# Altium PCB project_buran_a01.PcbDoc
Units mm, origin at the board's own origin, x right, y up, seen from the top; angles counter-clockwise.
Board outline 100 x 50 mm, 2 copper layers (Top Layer, Bottom Layer); 29 components, 35 nets, 148 pads, 196 vias.
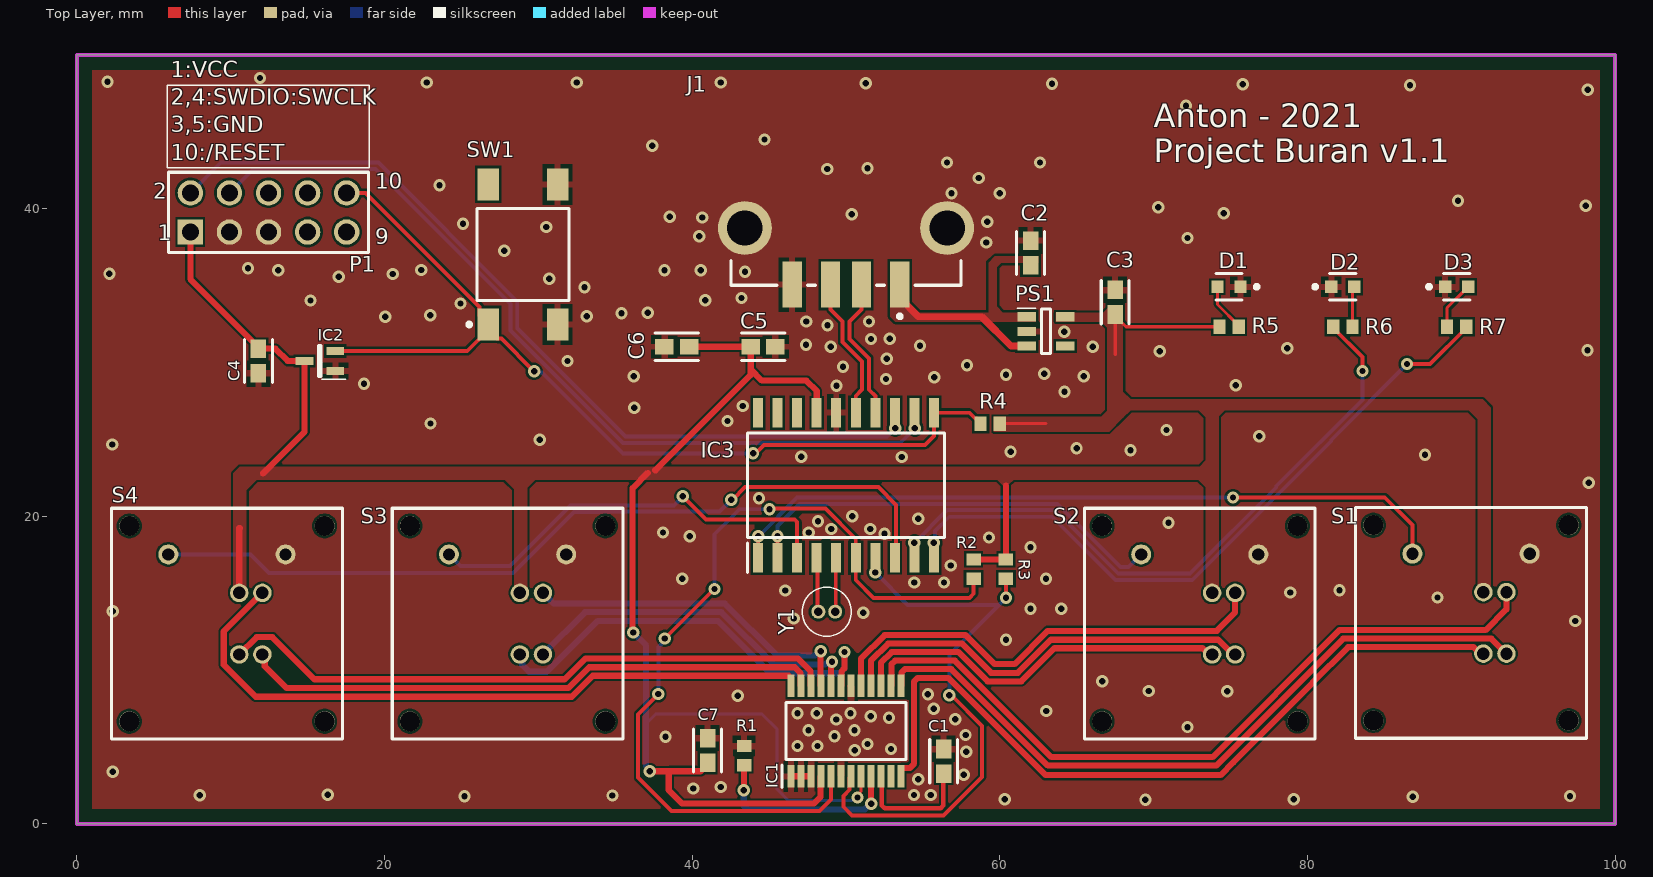
[diagram p0: Top Layer view]
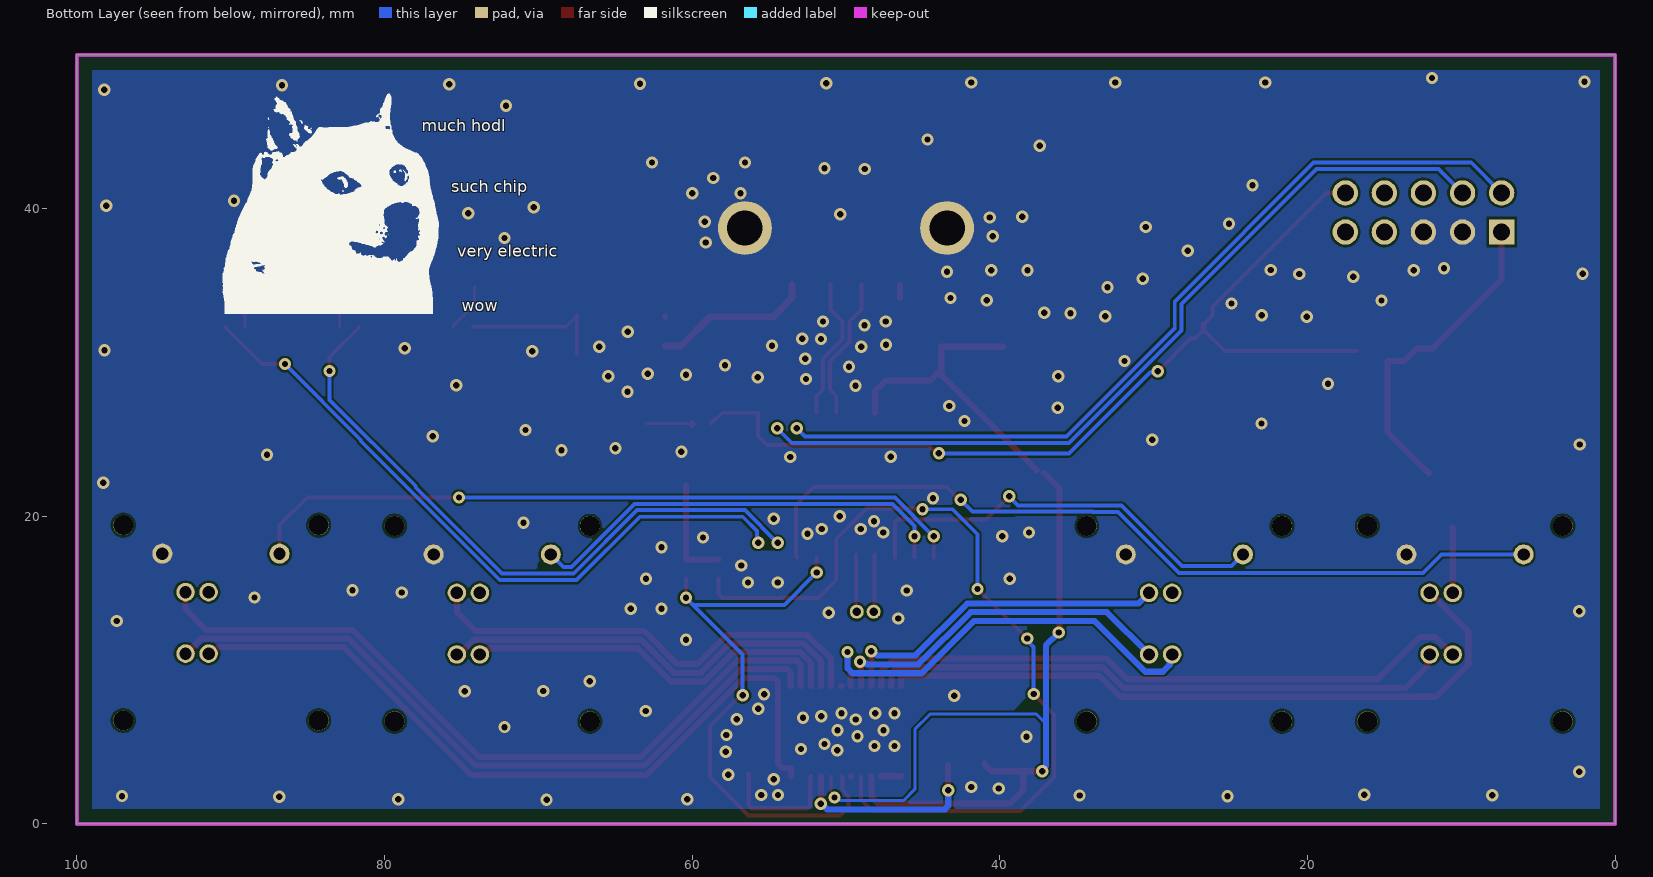
[diagram p1: Bottom Layer view, seen from below]
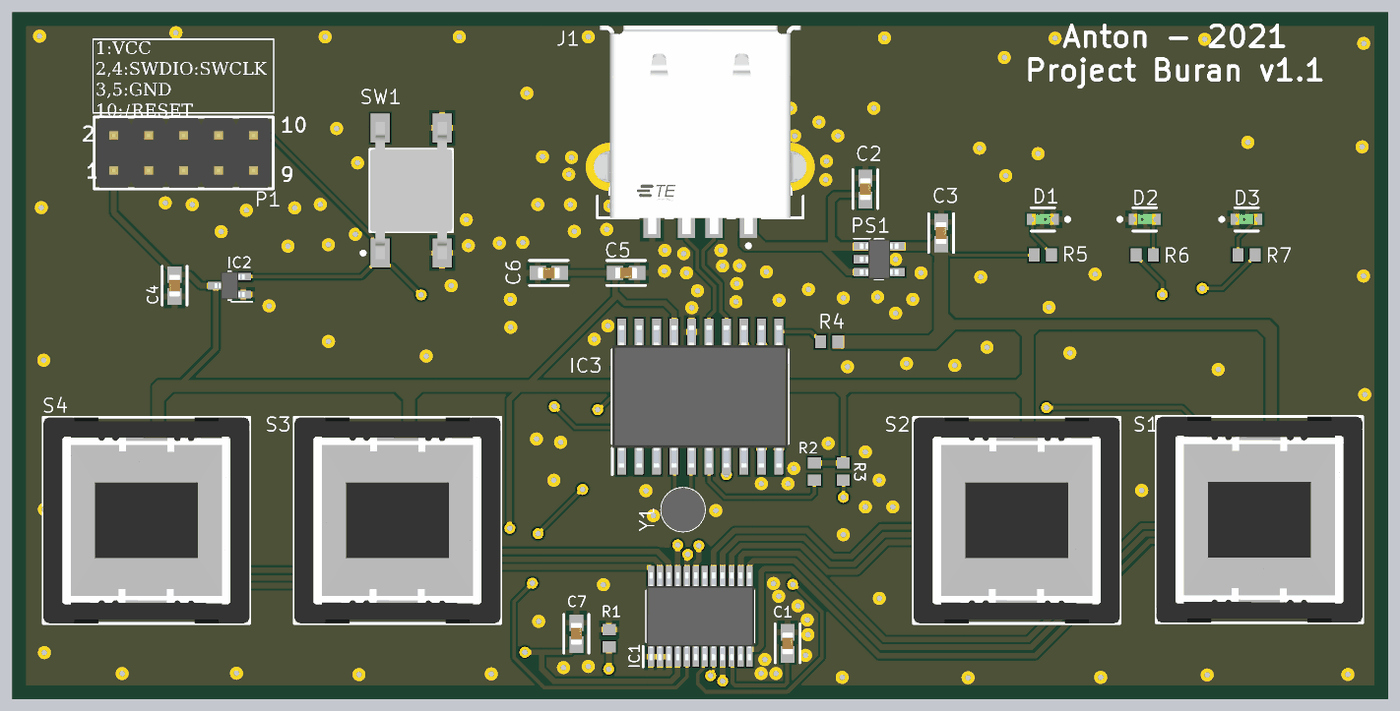
[diagram p2: 3D render of the assembled board from above, using the file's embedded part models]

## Layer stack, top to bottom
Top Solder: solder mask 0.0102, Solder Resist, Dk 3.5
Top Layer: signal copper 0.0356
Dielectric 1: dielectric 0.32, FR-4, Dk 4.8
Bottom Layer: signal copper 0.0356
Bottom Solder: solder mask 0.0102, Solder Resist, Dk 3.5

## Board outline
0,0 100,0 100,50 0,50

## Design rules (kind name [scope] priority, off if disabled: settings)
BoardOutlineClearance [All] p1: gap=0.381 ignorepadtopadclearanceinfootprint=FALSE
Clearance [All] p1: gap=0.152 ignorepadtopadclearanceinfootprint=FALSE except(0: Arc-Hole Track-Hole SMDPad-Hole THPad-Hole Via-Hole Fill-Hole Poly-Hole Region-Hole Text-Hole)
ComponentClearance [All] p1: gap=0.025 collisioncheckmode=3 verticalgap=0.025 showdistances=FALSE
DiffPairsRouting [All] p1: maxlimit=10 minlimit=0.152 mostfreqgap=0.203 toplayer_minwidth=0.152 toplayer_maxwidth=0.381 toplayer_prefwidth=0.203 bottomlayer_minwidth=0.152 bottomlayer_maxwidth=0.381 bottomlayer_prefwidth=0.203 maxuncoupledlength=12.7
HoleSize [All] p1: absolutevalues=TRUE maxlimit=6.731 minlimit=0.33 maxpercent=80.000 minpercent=20.000
HoleToHoleClearance [All] p1: gap=0.254 allowstackedmicrovias=FALSE
MinimumAnnularRing [All] p1: minimumring=0.178
MinimumSolderMaskSliver [All] p1: minsoldermaskwidth=0
PlaneClearance [All] p1: clearance=0.254
PlaneConnect [InNet('GND')] p1: planeconnectstyle=Relief reliefexpansion=0.406 reliefentries=4 reliefconductorwidth=0.152 reliefairgap=0.152
PolygonConnect PolygonConnect_RELIEF [(InComponent('C1') OR InComponent('C2') OR InComponent('C3') OR InComponent('C4') OR InComponent('C5') OR InComponent('C6') OR InComponent('C7') OR InComponent('D1') OR InComponent('D2') OR InComponent('D3') OR InComponent('IC1') OR InComponent('IC2') OR InComponent('IC3') OR InComponent('PS1') OR InComponent('R1') OR InComponent('SW1') OR InComponent('J1')) vs InNet('GND')] p1: thpad.connectstyle=Direct thpad.reliefconductorwidth=0.254 thpad.reliefentries=4 thpad.polygonreliefangle="90 Angle" thpad.airgapwidth=0.254 smdpad.connectstyle=Relief smdpad.reliefconductorwidth=0.42 smdpad.reliefentries=4 smdpad.polygonreliefangle="90 Angle" smdpad.airgapwidth=0.254 via.connectstyle=Direct via.reliefconductorwidth=0.254 via.reliefentries=4 via.polygonreliefangle="90 Angle" via.airgapwidth=0.254
PolygonConnect [All] p2: connectstyle=Direct reliefconductorwidth=0.203 reliefentries=4 polygonreliefangle="90 Angle" airgapwidth=0.152
RoutingCorners [All] p1: cornerstyle=45-Degree minsetback=1.25 maxsetback=1.25
RoutingVias [All] p1: holewidth=0.381 width=0.762 viastyle="Through Hole" minholewidth=0.33 minwidth=0.686 maxholewidth=2.54 maxwidth=2.896
SilkToSilkClearance [All] p1: silktosilkclearance=0
SilkToSolderMaskClearance [IsPad] p1: minsilkscreentomaskgap=0.152 clearancetoexposedcopper=TRUE
SolderMaskExpansion [All] p1: expansion=0.075 istentingtop=FALSE
Width [All] p1: maxlimit=10.16 minlimit=0.152 preferedwidth=0.203
20 further rules are at their usual default settings.

## Classes and differential pairs
differential pair D: +D_P -D_N

## Components (designator, comment, footprint, x,y, rotation, side; value= is the part's Value field where it differs from the comment)
C1 "GRM188R60J106ME47D" FP-GRM188-0_1-e0_2_0_55-IPC_A 56.35,4.075 r90 top
C2 "GRM188R60J106ME47D" FP-GRM188-0_1-e0_2_0_55-IPC_A 62,37.125 r90 top
C3 "GRM188R60J106ME47D" FP-GRM188-0_1-e0_2_0_55-IPC_A 67.5,33.925 r90 top
C4 "GRM188R60J106ME47D" FP-GRM188-0_1-e0_2_0_55-IPC_A 11.8,30.1 r270 top
C5 "GRM188R60J106ME47D" FP-GRM188-0_1-e0_2_0_55-IPC_A 44.61,31.025 r0 top
C6 "GRM188R60J106ME47D" FP-GRM188-0_1-e0_2_0_55-IPC_A 38.998,31.025 r180 top
C7 "GRM188R60J106ME47D" FP-GRM188-0_1-e0_2_0_55-IPC_A 41,4.775 r90 top
D1 "POWER LED" FP-LTST-C190GKT-MFG 74.9,34.925 r180 top
D2 "POWER LED" FP-LTST-C190GKT-MFG 82.3,34.925 r0 top
D3 "POWER LED" FP-LTST-C190GKT-MFG 89.7,34.925 r0 top
IC1 "LP5012PWR" SOP65P640X120-24N 50,6.041 r90 top
IC2 "MAX803SQ308T1G" SOT65P220X100-3N 15.8,30.1 r180 top
IC3 "ATSAMD11D14A-SSUT" SOIC127P1032X265-20N 50,22.025 r90 top
J1 "292303-7" FP-292303-7-MFG 50,42.025 r270 top
P1 "61301021121" 61301021121 12.46,39.755 r0 top
PS1 "TLV75733PDBVR" SOT95P280X145-5N 63,32.025 r0 top
R1 "CRCW0603110RFKEA" RESC1609X50X30NL10T20 43.375,4.45 r270 top
R2 "CRCW0603110RFKEA" RESC1609X50X30NL10T20 58.297,16.575 r90 top
R3 "CRCW0603110RFKEA" RESC1609X50X30NL10T20 60.397,16.575 r90 top
R4 "CRCW0603110RFKEA" RESC1609X50X30NL10T20 59.375,26.025 r0 top
R5 "CRCW0603110RFKEA" RESC1609X50X30NL10T20 74.9,32.325 r180 top
R6 "CRCW0603110RFKEA" RESC1609X50X30NL10T20 82.3,32.325 r180 top
R7 "CRCW0603110RFKEA" RESC1609X50X30NL10T20 89.7,32.325 r0 top
S1 "465M111172501" 465M111172501 90.634,13.076 r0 top
S2 "465M111172501" 465M111172501 73,13.025 r0 top
S3 "465M111172501" 465M111172501 28,13.025 r0 top
S4 "465M111172501" 465M111172501 9.756,13.025 r0 top
SW1 "FSM4JSMA" TECO-FSM4JSMA_V 29,37.025 r180 top
Y1 "AB38T-32.768KHZ" AB38T32768KHZ 48.2,13.8 r90 top

## Footprints (in the part's own frame and the unit in brackets; to place one, negate y for a bottom-side part, rotate by r counter-clockwise, add the part's x,y. Pads: shape width x height; smd on the part's side, far side on the other; paste and mask are expansions set on the pad)
465M111172501 [mm] "15x15mm THT Push Button Switch with integrated LED RGB"
  round 1.3 hole 0.8: 1(-3.81,4.5) 2(3.81,4.5)
  round 1.2 hole 0.8: L1(0.8,-2) L2(2.3,-2) L3(2.3,2) LC(0.8,2)
  round 1.3 hole 1.3 unplated: MH1(-6.35,-6.35) MH2(-6.35,6.35) MH3(6.35,6.35) MH4(6.35,-6.35)
  silkscreen extent -7.5,-7.5 7.5,7.5, body extent -7.5,-7.5 7.5,7.5, height 19.55
61301021121 [mm] "Pin Header, pitch 2.54 mm, THT, Vertical, dual row, 10p"
  rect 1.65x1.65 hole 1.1: 1(-5.08,-1.27)
  round 1.65 hole 1.1: 2(-5.08,1.27) 3(-2.54,-1.27) 4(-2.54,1.27) 5(0,-1.27) 6(0,1.27) 7(2.54,-1.27) 8(2.54,1.27) 9(5.08,-1.27) 10(5.08,1.27)
  silkscreen extent -6.5,-2.62 6.5,2.62, body extent -6.35,-2.54 6.35,2.54, height 8.59
AB38T32768KHZ [mm]
  round 0.91 hole 0.55: 1(0,0) 2(0,-1.1)
  silkscreen extent -1.6,-2.15 1.6,1.05, body extent -1.6,-2.15 1.6,1.05, height 8.4
FP-292303-7-MFG [mm]
  rect 3x1.25 smd paste+0 mask+0: 1(6.96,3.5) 2(6.96,1) 3(6.96,-1) 4(6.96,-3.5)
  round 3.5 hole 2.3 paste-1000 mask+0: 5(3.28,6.57) 6(3.28,-6.57)
  silkscreen extent 5.4,-7.47 9.15,7.47, body extent -7.1,-8.42 8.56,8.42, height 0.25
FP-GRM188-0_1-e0_2_0_55-IPC_A [mm]
  rect 1.208x1.012 smd paste+0 mask+0: 1(-0.802,0) 2(0.802,0)
  silkscreen extent -1.41,-0.91 1.41,0.91, body extent -1.91,-1.01 1.91,1.01, height 0.25
FP-LTST-C190GKT-MFG [mm]
  rect 0.8x0.8 smd paste+0 mask+0: 1(-0.75,0) 2(0.75,0)
  silkscreen extent -1.92,-0.85 0.85,0.85, body extent -1.25,-0.55 1.25,0.55, height 0.25
RESC1609X50X30NL10T20 [mm] "Chip Resistor, 2-Leads, Body 1.55x0.85mm, IPC Medium Density"
  rect 0.8x0.95 smd: 1(-0.625,0) 2(0.625,0)
  body extent -0.82,-0.48 0.82,0.48, height 0.5
SOIC127P1032X265-20N [mm]
  rect 1.925x0.65 smd: 1(-4.712,5.715) 2(-4.712,4.445) 3(-4.712,3.175) 4(-4.712,1.905) 5(-4.712,0.635) 6(-4.712,-0.635) 7(-4.712,-1.905) 8(-4.712,-3.175) 9(-4.712,-4.445) 10(-4.712,-5.715) 11(4.712,-5.715) 12(4.712,-4.445) 13(4.712,-3.175) 14(4.712,-1.905) 15(4.712,-0.635) 16(4.712,0.635) 17(4.712,1.905) 18(4.712,3.175) 19(4.712,4.445) 20(4.712,5.715)
  silkscreen extent -5.68,-6.4 3.4,6.4, body extent -5.16,-6.4 5.16,6.4, height 2.65
SOP65P640X120-24N [mm]
  rect 1.475x0.45 smd: 1(-2.938,3.575) 2(-2.938,2.925) 3(-2.938,2.275) 4(-2.938,1.625) 5(-2.938,0.975) 6(-2.938,0.325) 7(-2.938,-0.325) 8(-2.938,-0.975) 9(-2.938,-1.625) 10(-2.938,-2.275) 11(-2.938,-2.925) 12(-2.938,-3.575) 13(2.938,-3.575) 14(2.938,-2.925) 15(2.938,-2.275) 16(2.938,-1.625) 17(2.938,-0.975) 18(2.938,-0.325) 19(2.938,0.325) 20(2.938,0.975) 21(2.938,1.625) 22(2.938,2.275) 23(2.938,2.925) 24(2.938,3.575)
  silkscreen extent -3.67,-3.9 1.85,4.15, body extent -3.2,-3.9 3.2,3.9, height 1.2
SOT65P220X100-3N [mm]
  rect 1.15x0.55 smd: 1(-1,0.65) 2(-1,-0.65) 3(1,0)
  silkscreen extent -1.67,-1 0.08,1.17, body extent -1.1,-1 1.1,1, height 1
SOT95P280X145-5N [mm]
  rect 1.2x0.6 smd: 1(-1.25,0.95) 2(-1.25,0) 3(-1.25,-0.95) 4(1.25,-0.95) 5(1.25,0.95)
  silkscreen extent -1.85,-1.45 0.3,1.5, body extent -1.4,-1.45 1.4,1.45, height 1.45
TECO-FSM4JSMA_V [mm] "SMD, 4-Leads, Body 6x6mm, Pitch 4.5mm"
  rect 1.4x2.1 smd: 1(2.25,4.55) 2(2.25,-4.55) 3(-2.25,4.55) 4(-2.25,-4.55)
  silkscreen extent -3,-3 3.62,4.67, body extent -3,-5 3,5, height 5.08

## Part data
C1 C2 C3 C4 C5 C6 C7: library part CMP-2006-02792-2, "Chip Multilayer Ceramic Capacitors for General Purpose, 0603, 10uF, X5R, 15%, 20%, 6.3V", Capacitance=10uF, Case Code (Imperial)=0603, Case Code (Metric)=1608, Dielectric=X5R, Max Operating Temperature=85°C, Min Operating Temperature=-55°C, Package Quantity=4000, Tolerance=20%, Voltage=6.3V, Case/Package=0603, Depth=0.8mm, Height=0.8mm, Lead Free="Lead Free", Length=1.6mm, Material=Ceramic, Mount="Surface Mount", Packaging="Tape and Reel", Radiation Hardening=No, REACH SVHC="No SVHC", Termination=SMD/SMT, Thickness=0.035inch, Voltage Rating=6.3V, Voltage Rating (DC)=6.3V, Width=0.031inch
D1 D2 D3: library part CMP-22017-000005-2, "LED GREEN CLEAR CHIP SMD", Case Code (Imperial)=0603, Case Code (Metric)=1608, Color=Green, Forward Current=30mA, Forward Voltage=2.1V, Lens Color=Colorless, Max Operating Temperature=85°C, Min Operating Temperature=-55°C, Package Quantity=1, Power Dissipation=100mW, Reverse Voltage=5V, Test Current=10mA, Voltage=2V, Case/Package=0603, Depth=0.8mm, Dominant Wavelength=569nm, Height=0.8mm, Illumination Color=Green, Lead Free="Lead Free", Length=1.6mm, Lens Style=Clear, Lens Transparency=Clear, Luminous Intensity=6mcd, Mount="Surface Mount", Number of Elements=1, Number of LEDs=1, Number of Pins=2, Packaging="Tape and Reel", Power Rating=100mW, Radiation Hardening=No, Viewing Angle=130°, Wavelength=565nm, Width=0.8mm
IC1: "Integrated Circuit", Manufacturer_Name="Texas Instruments", Mouser Part Number=595-LP5012PWR, Datasheet Link=https://www.ti.com/lit/ds/symlink/lp5012.pdf?ts=1615929314042&ref_url=https%253A%252F%252Fwww.mouser.co.uk%252F, Height=1.2mm, Manufacturer_Part_Number=LP5012PWR, Mouser Price/Stock=https://www.mouser.co.uk/ProductDetail/Texas-Instruments/LP5012PWR/?qs=T94vaHKWudSL6jLwBy12Hg%3D%3D
IC2: "Integrated Circuit", Manufacturer_Name="ON Semiconductor", Mouser Part Number=863-MAX803SQ308T1G, Arrow Part Number=MAX803SQ308T1G, Arrow Price/Stock=https://www.arrow.com/en/products/max803sq308t1g/on-semiconductor, Datasheet Link=http://www.onsemi.com/pub/Collateral/MAX803-D.PDF, Height=1mm, Manufacturer_Part_Number=MAX803SQ308T1G, Mouser Price/Stock=https://www.mouser.co.uk/ProductDetail/ON-Semiconductor/MAX803SQ308T1G?qs=aSUclzrs14xj4ys5ck7Tew%3D%3D
IC3: "Integrated Circuit", Manufacturer_Name=Microchip, Mouser Part Number=556-ATSAMD11D14ASSUT, Arrow Part Number=ATSAMD11D14A-SSUT, Arrow Price/Stock=https://www.arrow.com/en/products/atsamd11d14a-ssut/microchip-technology, Datasheet Link=http://ww1.microchip.com/downloads/en/devicedoc/atmel-42363-sam-d11_datasheet.pdf, Height=2.65mm, Manufacturer_Part_Number=ATSAMD11D14A-SSUT, Mouser Price/Stock=https://www.mouser.co.uk/ProductDetail/Microchip-Technology-Atmel/ATSAMD11D14A-SSUT/?qs=lrqjml%252Bjt8f8EFewxXrzCw%3D%3D
J1: library part CMP-03360-000008-1, "CONN RCPT USB2.0 TYPEA 4P SMD RA", Current Rating=1A, Manufacturer="TE Connectivity", Temperature="-55°C to +85°C", Temperature Range High=+85°C, Temperature Range Low=-55°C, Voltage Rating=30V, Automotive=No, Category=Conn, ComponentLink2Description=Datasheet, ComponentLink2URL=https://www.te.com/usa-en/product-292303-7.html?te_bu=Cor&te_type=other&te_campaign=oct_glo_cor-oct-global-oth-prtnr-fy19-oct-octo-buy-bom_sma-298_2&elqCampaignId=35216, Conn Orientation="Right Angle", Contact Material=Gold,Nickel, Device Class L1=Connectors, Device Class L2="USB Connectors", Device Class L3=unset, Digikey Description="CONN RCPT USB2.0 TYPEA 4P SMD RA", Is Female=yes, Lead Free=Yes, Manufacturer Part Number=292303-7, Mouser Description="USB Connectors USB A R/A Recpt Assy SMT", Number Of Contacts=4, Octopart=https://octopart.com/292303-7-te+connectivity-42840369, Package=292303-7, RoHS=TRUE, Shielding=true, Usb Standard="USB 2.0"
P1: library part CMP-1502-01084-1, "THT Vertical Pin Header WR-PHD, Pitch 2.54 mm, Dual Row, 10 pins", Contact Resistance=20mOhm, Manufacturer="Wurth Elektronik", Operating Temperature=-40to105degC, Rated Current=3A, Withstanding Voltage=500VAC, Working Voltage=250VAC, Datasheet URL=https://katalog.we-online.de/em/datasheet/6130xx21121.pdf, Gender=Male, Manufacturer URL=http://www.we-online.de, Mounting Technology=THT, Orientation=Vertical, Package Reference=61301021121, Packaging=Bag, Part Number=61301021121, Pin Number=10, Pitch=2.54mm, Publisher=WurthElektronik, Row Number=Dual
PS1: "Power Supply", Manufacturer_Name="Texas Instruments", Mouser Part Number=595-TLV75733PDBVR, Arrow Part Number=TLV75733PDBVR, Arrow Price/Stock=https://www.arrow.com/en/products/tlv75733pdbvr/texas-instruments, Datasheet Link=http://www.ti.com/lit/gpn/tlv757p, Height=1.45mm, Manufacturer_Part_Number=TLV75733PDBVR, Mouser Price/Stock=https://www.mouser.co.uk/ProductDetail/Texas-Instruments/TLV75733PDBVR/?qs=y6ZabgHbY%252BwAAzSntTW34w%3D%3D
R1 R2 R3 R4 R5 R6 R7: library part CMP-2000-03854-1, Manufacturer="Vishay Dale", Part Number=CRCW0603110RFKEA
S1 S2 S3 S4: "WS-PBTL Illuminated THT Push Button Switch, Red & Green & Blue", Emitting Color="Red & Green & Blue", Operating Temperature="-40 to +85degC", Rated Current=100mA, Rated Voltage=12VDC, ComponentLink1Description=Manufacturer, ComponentLink1URL=http://www.we-online.de, ComponentLink2Description=Datasheet, ComponentLink2URL=https://katalog.we-online.com/em/datasheet/465M111172501.pdf, Contact Material="Copper Alloy", Contact Plating=Gold, Mounting Technology=THT, Operation Force=200gf, Packaging="ESD Tray", Part Number=465M111172501, Published Date="September 2019", Publisher="Wurth Elektronik", Size=15x15mm, Terminal Material="Copper Alloy", Terminal Plating=Tin
SW1: library part CMP-2000-05602-2, "Swicth, SPST, 24 V, -35 to 85 degC, 4-Pin SMD, RoHS, Tape and Reel", Case\/Package=SMD/SMT, Contact Current Rating=50mA, Contact Resistance=100mOhm, Manufacturer="TE Connectivity", Max Operating Temperature=85degC, Max Voltage Rating (DC)=12V, Min Operating Temperature=-35degC, Operating Force=1.57N, Package Description="4-Pin Surface Mount Device, Body 6 x 6 mm, Pitch 4.5 mm", Package Quantity=750, Voltage Rating=24V, Actuator Length=0.055inch, Actuator Material=Polyamide, Contact Material=CopperAlloy, Contact Plating=Silver, Current Rating=50mA, Datasheet URL=http://www.te.com/commerce/DocumentDelivery/DDEController?Action=showdoc&DocId=Customer+Drawing%7F2-1437565-7%7FV%7Fpdf%7FEnglish%7FENG_CD_2-1437565-7_V.pdf%7F4-1437565-2, Datasheet Version="Rev. V, 02/2015", Electrical Life=100000Cycles, Illumination Type=Illuminated, Length=6mm, Manufacturer URL=http://www.te.com/, Mechanical Life=100000Cycles, Mount=SurfaceMount, Mounting Technology=SurfaceMount, Orientation=Straight, Package Reference=FSM4JSMA, Packaging=LoosePiece, REACH SVHC=Unknown, RoHSCompliant=true, Switch Travel=0.25mm, Termination=GullWing, Throw Configuration=SPST, Voltage Rating (DC)=24V, Width=6mm
Y1: "Crystal or Oscillator", Manufacturer_Name=ABRACON, Mouser Part Number=815-AB38T-32.768KHZ, Arrow Part Number=AB38T-32.768KHZ, Arrow Price/Stock=https://www.arrow.com/en/products/ab38t-32.768khz/abracon, Datasheet Link=http://www.abracon.com/Resonators/AB38T.pdf, Height=8.3mm, Manufacturer_Part_Number=AB38T-32.768KHZ, Mouser Price/Stock=https://www.mouser.co.uk/ProductDetail/ABRACON/AB38T-32768KHZ/?qs=m%252BUhWDcpCfbdp9ovMbeW3g%3D%3D

## Via types
v1: diameter 0.8, hole 0.411, Top Layer to Bottom Layer, 196 vias

## Nets (pads, with @x,y where several pads share a name; then routed paths per layer and width w, separated by ;. In a path a pad name is that pad's centre, name@x,y a point inside that pad or via, vN(x,y) a via of type N, cw(c..) or ccw(c..) an arc to the next point about the centre after c; other vN are vias at no path point)
/RESET: IC2.2 IC3.11 P1.10 R4.1 SW1.1 | length 61.4
  Top Layer w0.254: IC2.2 25.375,30.75 SW1.1@26.75,32.125 ; P1.10 18.775,41.025 26.177,33.623 26.177,33.048 SW1.1 ; SW1.1@26.888,31.988 27.323,31.552 27.598,31.552 v1(29.725,29.425) ; v1(43.96,24.096) 44.108,24.096 44.657,24.645 55.145,24.645 55.715,25.215 IC3.11 58.038,26.737 58.402,26.373 58.477,26.373 58.75,26.1 R4.1
  Top Layer w0.4: SW1.1@26.75,32.125 SW1.1
  Bottom Layer w0.254: v1(29.725,29.425) 29.798,29.352 30.248,29.352 35.504,24.096 v1(43.96,24.096)
D_N: IC3.14 J1.2 | length 9.3
  Top Layer w0.254: J1.2 51,33.438 50.229,32.667 50.229,31.531 51.5,30.26 51.5,28.231 51.905,27.827 IC3.14
D_P: IC3.15 J1.3 | length 9.3
  Top Layer w0.254: J1.3 49,33.438 49.771,32.667 49.771,31.342 51.043,30.07 51.043,28.234 50.635,27.827 IC3.15
GND: C1.2 C2.2 C3.2 C4.2 C5.2 C6.2 C7.2 D1.1 D2.1 D3.1 IC1.1 IC1.2 IC1.3 IC1.6 IC1.18 IC2.1 IC3.16 J1.4 J1.5 J1.6 P1.3 P1.5 PS1.2 R1.1 S1.2 S2.2 S3.2 S4.2 SW1.3 SW1.4 | length 4.3
  Top Layer w0.203: v1(40.45,38.2) v1@40.564,38.314 ; J1.6@42.999,38.314 J1.6 ; J1.5 J1.5@57.015,38.3 ; D2.1@81.488,34.987 D2.1
  Top Layer w0.4: IC1.1@46.4,3.128 IC1.1 IC1.2 ; J1.4@46.5,34.19 J1.4 ; IC1.2@47.062,3.115 IC1.2 ; IC1.3 IC1.2 ; IC1.18@50.313,8.967 IC1.18 ; J1.5 J1.5@56.975,39.15
  other v1: 69.464,1.575 60.314,1.6 79.1,1.6 86.839,1.775 25.2,1.8 97.065,1.814 34.814,1.85 7.989,1.875 54.425,1.886 55.5,1.881 16.3,1.9 40.062,2.311 41.863,2.401 54.7,2.9 57.65,3.206 2.339,3.4 57.825,4.706 50.562,4.799 52.925,4.877 46.85,5.075 48.15,5.075 51.4,5.2 38.262,5.676 49.25,5.7 57.775,5.781 47.562,6.099 50.55,6.1 72.2,6.3 49.362,6.799 57.1,6.8 52.8,6.9 51.6,7 46.85,7.2 48.1,7.2 50.289,7.199 63.014,7.35 55.7,7.5 42.962,8.34 55.325,8.431 69.691,8.641 74.789,8.625 66.65,9.275 60.397,11.977 97.4,13.2 46.595,13.365 51.13,13.739 2.339,13.825 62,14 64,14 88.451,14.721 78.88,15.05 46.05,15.181 82.08,15.2 54.442,15.694 56.372,15.694 39.364,15.943 63,15.95 56.8,16.8 62,18 59.3,18.625 39.85,18.706 52.5,18.875 38.1,18.946 47.575,18.95 49.04,19.175 51.58,19.175 70.97,19.587 48.178,19.684 54.698,19.845 50.4,20 44.347,21.174 98.289,22.175 53.629,23.859 47.088,23.865 87.639,24 60.7,24.2 68.5,24.3 64.991,24.434 2.289,24.675 30.089,24.975 76.864,25.2 70.84,25.617 22.985,26.04 42.3,26.2 36.233,27.069 43.289,27.175 64.2,28.1 49.387,28.49 75.339,28.525 18.664,28.625 52.6,28.925 55.728,29.043 36.2,29.1 65.447,29.1 60.4,29.2 62.889,29.275 49.8,29.725 57.864,29.825 31.9,30.1 52.65,30.25 70.389,30.725 98.2,30.8 78.693,30.935 49,31.025 66.039,31.025 54.809,31.1 47.401,31.157 51.625,31.531 52.839,31.55 64.195,32.006 48.8,32.425 47.425,32.667 51.5,32.667 20.038,32.978 33.148,33.015 22.975,33.075 35.4,33.2 37.105,33.242 24.937,33.836 15.185,34.028 40.85,34.05 43.204,34.19 33,34.9 30.7,35.45 17.02,35.582 2.114,35.775 20.527,35.76 43.43,35.9 13.083,35.996 38.196,36 40.564,36 22.391,36.011 11.125,36.125 27.775,37.275 59.125,37.8 72.2,38.1 30.516,38.808 25.1,39.03 59.175,39.15 40.65,39.425 38.539,39.476 50.375,39.631 74.55,39.7 70.3,40.1 98.1,40.2 89.789,40.525 56.861,41 60,41 23.575,41.531 58.625,42 48.775,42.581 51.398,42.624 56.57,43 62.616,43.009 37.4,44.1 44.7,44.5 72.1,46.7 98.214,47.725 86.664,48.025 75.789,48.1 63.389,48.125 51.289,48.15 22.739,48.2 32.489,48.2 41.864,48.2 1.989,48.25 11.9,48.5
LED_OUT_1: IC3.9 R6.2 | length 42
  Top Layer w0.254: R6.2 81.675,32.25 83.575,30.35 v1(83.575,29.45)
  Bottom Layer w0.254: v1(54.442,18.278) 56.564,20.4 63.575,20.4 67.7,16.275 72.361,16.275 77.968,21.882 77.968,21.969 83.575,27.576 v1(83.575,29.45)
LED_OUT_2: IC3.10 R7.2 | length 44.3
  Top Layer w0.254: v1(86.475,29.9) 87.975,29.9 90.325,32.25 R7.2
  Bottom Layer w0.254: v1(55.712,18.278) 55.798,18.364 55.798,19.059 56.714,19.975 63.399,19.975 67.524,15.85 72.511,15.85 81.548,24.887 81.548,24.973 v1(86.475,29.9)
NetC1_1: C1.1 IC1.10 | length 8.1
  Top Layer w0.3: IC1.10 52.335,3.043 52.335,1.201 52.511,1.025 56.148,1.025 56.323,1.201 56.323,3.247 C1.1
NetD1_2: D1.2 R5.1 | length 3.2
  Top Layer w0.203: D1.2 74.15,33.775 75.525,32.4 R5.1
NetD2_2: D2.2 R6.1 | length 2.7
  Top Layer w0.203: R6.1 82.925,34.8 D2.2
NetD3_2: D3.2 R7.1 | length 3.2
  Top Layer w0.203: R7.1 89.075,33.55 D3.2
NetIC1_9: IC1.9 R1.2 | length 13
  Top Layer w0.4: v1(43.35,2.2) 43.363,2.213 43.363,3.813 R1.2 ; IC1.9 51.629,3.099 51.629,1.329 v1(51.632,1.325)
  Bottom Layer w0.4: v1(43.35,2.2) 43.35,1.184 43.584,0.95 51.216,0.95 51.591,1.325 v1(51.632,1.325)
OUT0: IC1.12 S1.L1 | length 50.2
  Top Layer w0.4: IC1.12 53.575,3.615 53.6,3.64 54.14,3.64 54.425,3.925 54.425,9.266 54.659,9.5 56.65,9.5 62.975,3.175 74.35,3.175 75.175,4 80.325,9.15 80.325,9.175 82.65,11.5 90.8,11.5 91.224,11.076 S1.L1
OUT1: IC1.13 S1.L2 | length 46.7
  Top Layer w0.4: IC1.13 53.6,9.004 53.6,9.841 53.834,10.075 56.856,10.075 63.129,3.802 74.077,3.802 82.327,12.052 91.958,12.052 S1.L2
OUT2: IC1.14 S1.L3 | length 49.2
  Top Layer w0.4: IC1.14 52.95,9.004 52.95,10.381 53.197,10.627 57.085,10.627 63.358,4.355 73.83,4.355 82.08,12.605 91.58,12.605 92.934,13.959 S1.L3
OUT3: IC1.15 S2.L1 | length 25.2
  Top Layer w0.4: IC1.15 52.275,10.487 52.968,11.18 57.314,11.18 59.219,9.275 61.4,9.275 63.55,11.425 73.184,11.425 73.584,11.025 S2.L1
OUT4: IC1.16 S2.L2 | length 27.8
  Top Layer w0.4: IC1.16 51.625,10.618 52.739,11.732 57.543,11.732 59.447,9.827 61.171,9.827 63.321,11.977 74.194,11.977 75.147,11.025 S2.L2
OUT5: IC1.17 S2.L3 | length 30.2
  Top Layer w0.4: IC1.17 50.975,10.749 52.51,12.285 57.771,12.285 59.656,10.4 60.963,10.4 63.113,12.55 74.098,12.55 75.3,13.752 S2.L3
OUT6: IC1.19 S3.L1 | length 28.1
  Top Layer w0.4: IC1.19 49.7,9.004 49.7,9.913 49.9,10.113 v1(49.9,11.18)
  Bottom Layer w0.4: S3.L1 28.953,10.872 28.953,10.347 29.4,9.9 30.55,9.9 33.85,13.2 41.675,13.2 45.075,9.8 49.587,9.8 49.9,10.113 v1(49.9,11.18)
OUT7: IC1.20 S3.L2 | length 23
  Top Layer w0.4: IC1.20 49.025,10.484 v1(49.094,10.552)
  Bottom Layer w0.4: S3.L2 33.048,13.773 41.896,13.773 45.295,10.374 48.66,10.374 48.761,10.476 49.017,10.476 v1(49.094,10.552)
OUT8: IC1.21 S3.L3 | length 22.1
  Top Layer w0.4: v1(48.366,11.238) 48.341,11.213 48.341,9.827 48.35,9.818 48.35,9.004 IC1.21
  Bottom Layer w0.4: S3.L3 31,14.325 42.125,14.325 45.485,10.965 47.985,10.965 48.258,11.238 v1(48.366,11.238)
OUT9: IC1.22 S4.L1 | length 40.6
  Top Layer w0.4: S4.L1 11.681,12.15 12.7,12.15 15.441,9.409 31.705,9.409 33.066,10.769 46.877,10.769 47.7,9.946 47.7,9.004 IC1.22
OUT10: IC1.23 S4.L2 | length 37.8
  Top Layer w0.4: S4.L2 12.209,10.872 12.209,10.259 13.634,8.834 15.925,8.834 19.428,8.834 31.944,8.834 33.304,10.194 46.67,10.194 47.05,9.815 47.05,9.004 IC1.23
OUT11: IC1.24 S4.L3 | length 44.6
  Top Layer w0.4: S4.L3 9.55,12.519 9.55,10.35 11.625,8.275 19.197,8.275 32.175,8.275 33.535,9.635 46.281,9.635 46.425,9.491 IC1.24
SCL: IC1.7 IC3.7 R3.1 | length 38
  Top Layer w0.254: IC1.7 50.227,3.005 50.227,2.227 49.825,1.825 49.825,1.124 50.399,0.55 56.35,0.55 58.85,3.05 58.85,6.375 56.857,8.368 v1(56.718,8.368) ; v1(51.905,16.351) IC3.7 IC3.7@51.907,17.311 ; v1(60.397,14.7) R3.1
  Bottom Layer w0.254: v1(51.905,16.351) 54.006,14.25 59.947,14.25 ; v1@56.65,8.436 v1(56.718,8.368) 56.718,11.021 59.947,14.25 ; v1@60.249,14.7 v1(60.397,14.7) 59.947,14.25
SDA: IC1.5 IC3.6 R2.1 | length 55.8
  Top Layer w0.254: v1(37.8,8.45) 36.475,7.125 36.475,3.011 38.643,0.843 48.268,0.843 49.025,1.6 IC1.5 ; v1(38.217,12.061) v1@41.45,15.294 ; v1(45.029,20.462) 45.065,20.498 48.678,20.498 50.635,18.541 IC3.6 50.635,15.865 51.8,14.7 58.028,14.7 58.297,14.969 R2.1
  Bottom Layer w0.254: v1(37.8,8.45) 37.8,11.497 38.217,11.914 v1(38.217,12.061) ; v1(41.45,15.275) 41.45,18.835 43.077,20.462 v1(45.029,20.462)
SW0: IC3.1 S1.1 | length 47.6
  Top Layer w0.254: IC3.1 44.293,17.321 44.293,18.693 v1(44.3,18.7) ; v1(75.158,21.225) 85.025,21.225 86.824,19.426 S1.1
  Bottom Layer w0.254: v1(44.3,18.7) 46.825,21.225 v1(75.158,21.225)
SW1: IC3.2 S2.1 | length 28.3
  Top Layer w0.254: v1(45.55,18.7) 45.553,18.697 45.553,17.316 IC3.2
  Bottom Layer w0.254: v1(45.55,18.7) 45.55,19.375 46.981,20.806 63.744,20.806 67.85,16.7 68.365,16.7 S2.1
SW2: IC3.3 S3.1 | length 28
  Top Layer w0.254: S3.1@24.19,17.385 S3.1 ; v1(39.395,21.3) 40.912,19.783 46.668,19.783 46.825,19.626 IC3.3
  Bottom Layer w0.254: S3.1 24.94,16.775 28.164,16.775 32.089,20.7 33.786,20.7 33.797,20.711 38.805,20.711 v1(39.395,21.3)
SW3: IC3.8 S4.1 | length 54.1
  Top Layer w0.254: v1(42.549,21.075) 42.617,21.075 43.442,21.9 52.1,21.9 53.25,20.75 53.25,17.388 IC3.8
  Bottom Layer w0.254: S4.1 11.28,17.525 12.48,16.325 28.35,16.325 32.319,20.294 33.954,20.294 33.965,20.304 41.778,20.304 v1(42.549,21.075)
SWCLK: IC3.12 P1.4 | length 54
  Bottom Layer w0.254: P1.4 11.47,42.575 19.425,42.575 28.2,33.8 28.2,32.075 35.5,24.775 53.525,24.775 v1(54.475,25.725)
SWDIO: IC3.13 P1.2 | length 55.2
  Bottom Layer w0.254: P1.2 9.355,43 19.601,43 28.625,33.976 28.625,32.251 35.676,25.2 52.675,25.2 v1(53.2,25.725)
V_UNREG: C2.1 J1.1 PS1.1 PS1.3 | length 10.4
  Top Layer w0.45: J1.1 53.5,34.19 54.715,32.975 58.825,32.975 60.725,31.075 PS1.3
VCC: C3.1 C4.1 C5.1 C6.1 C7.1 IC1.4 IC1.8 IC2.3 IC3.17 P1.1 PS1.5 R2.2 R3.2 R4.2 R5.2 S1.LC S2.LC S3.LC S4.LC | length 123.4
  Top Layer w0.203: v1(50.75,1.725) 50.75,1.886 50.975,2.111 IC1.8 ; R4.2 63,26.025 ; 67.5,30.525 C3.1@67.5,33.025 ; C3.1 C3.1@67.5,33.025 ; R5.2 68.2,32.325 C3.1@67.5,33.025
  Top Layer w0.4: P1.1 7.38,35.42 11.8,31 C4.1 12.899,30.902 13.7,30.1 IC2.3 14.8,25.5 12.1,22.8 ; S4.LC 10.556,19.227 10.596,19.227 ; v1(36.164,12.448) 36.125,12.486 36.125,21.825 37.121,22.821 ; v1(37.25,3.425) 38.475,3.425 ; 37.6,23 37.608,23 43.808,29.2 43.808,29.552 ; C6.1 C5.1 43.808,29.552 ; C7.1 41,3.875 40.55,3.425 38.475,3.425 ; IC3.17 48.095,28.155 47.425,28.825 44.535,28.825 43.808,29.552 ; IC1.4 48.35,3.078 48.35,1.775 47.9,1.325 39.35,1.325 38.475,2.2 38.475,3.425 ; R2.2 R3.2 60.397,22 ; R4.2@60,25.95 R4.2
  Bottom Layer w0.203: 37,6.525 37.625,7.15 44.525,7.15 45.525,6.15 45.525,2.25 46.25,1.525 50.389,1.525 50.589,1.725 v1(50.75,1.725)
  Bottom Layer w0.4: v1(36.164,12.448) 37,11.611 37,6.525 37,3.783 37.25,3.533 v1(37.25,3.425)
XIN32: IC3.4 Y1.1 | length 3.8
  Top Layer w0.254: IC3.4 IC3.4@48.148,17.261 ; Y1.1@48.148,13.603 Y1.1@48.2,13.55 ; Y1.1@48.148,13.853 IC3.4@48.148,17.261 ; IC3.4@48.148,17.511 IC3.4@48.148,17.261
XOUT32: IC3.5 Y1.2 | length 3.8
  Top Layer w0.254: Y1.2@49.3,13.55 Y1.2@49.333,13.583 ; Y1.2@49.333,13.833 IC3.5@49.333,17.281 ; IC3.5@49.333,17.531 IC3.5@49.333,17.281 ; IC3.5 IC3.5@49.333,17.281
pads on no net: IC1.11 IC3.18 IC3.19 IC3.20 P1.6 P1.7 P1.8 P1.9 PS1.4 S1.MH1 S1.MH2 S1.MH3 S1.MH4 S2.MH1 S2.MH2 S2.MH3 S2.MH4 S3.MH1 S3.MH2 S3.MH3 S3.MH4 S4.MH1 S4.MH2 S4.MH3 S4.MH4 SW1.2

## Polygon pours and split planes (outlines as drawn)
GND on Top Layer "GND_L01_P015" (solid, pour order 15): 1,49 99,49 99,1 1,1
VCC on Top Layer "VCC_L01_P007" (solid, pour order 7): 68,26.4 67.106,25.506 59.619,25.506 59.6,25.525 59.6,26.475 66.591,26.475 67.373,27.256 67.975,26.475 68.022,26.422
VCC on Top Layer "VCC_L01_P009" (solid, pour order 9): 73.376,14.65 74.224,14.65 74.224,27.6 73.376,27.6
VCC on Top Layer "VCC_L01_P011" (solid, pour order 11): 74.224,22.388 74.224,23.236 73.382,23.633 72.985,23.236 10.6,23.236 10.176,22.812 10.176,22.388 11.018,21.706 11.7,22.388 27.8,22.388 28.426,21.762 29.273,21.861 29.8,22.388 59.838,22.388 60.198,22.027 60.594,22.084 60.898,22.388 72.9,22.388 73.382,21.906
VCC on Top Layer "VCC_L01_P008" (solid, pour order 8): 66.982,26.866 67.016,26.9 68.003,26.403 68.5,26.9 72.925,26.9 73.375,26.45 74.225,26.5 74.625,26.9 90.488,26.9 91.094,26.294 91.924,26.9 91.924,27.076 91.4,27.6 68.5,27.6 68.003,28.097 66.988,27.6
V_UNREG on Top Layer "V_UNREG_L01_P003" (solid, pour order 3): 59.276,32.677 59.8,32.674 59.8,36.9 59.678,36.9 59.276,36.499
V_UNREG on Top Layer "V_UNREG_L01_P001" (solid, pour order 1): 52.876,32.986 52.876,33.25 53.774,34.076 54.6,33.25 59.276,33.25 59.8,33.647 60.197,33.25 62.349,33.25 62.349,32.649 53.209,32.652
V_UNREG on Top Layer "V_UNREG_L01_P000" (solid, pour order 0): 52.873,34 54.123,33.997 54.123,32.652 53.209,32.652 52.876,32.986
VCC on Top Layer "VCC_L01_P005" (solid, pour order 5): 63.65,32.65 66.6,32.65 66.989,32.261 68.006,32.653 68.006,33.2 68.006,33.25 67.003,33.528 66.725,33.25 63.65,33.25
VCC on Top Layer "VCC_L01_P013" (solid, pour order 13): 28.42,14.576 29.268,14.576 29.268,22.637 28.945,22.637 28.42,22.637
VCC on Top Layer "VCC_L01_P012" (solid, pour order 12): 10.176,14.7 11.024,14.7 11.024,22.636 10.6,22.636 10.176,22.636
VCC on Top Layer "VCC_L01_P006" (solid, pour order 6): 66.994,32.74 68.006,32.74 68.006,26.428 67.084,25.506 66.982,25.506
V_UNREG on Top Layer "V_UNREG_L01_P004" (solid, pour order 4): 62.5,36.9 62.5,36.499 60.1,36.499 59.799,36.197 59.276,36.499 59.678,36.9
VCC on Top Layer "VCC_L01_P010" (solid, pour order 10): 91.076,15 91.924,15 91.924,27.076 91.4,27.6 91.076,27.6
GND on Bottom Layer "GND_L02_P014" (solid, pour order 14): 1,49 99,49 99,1 1,1

## Keep-outs
Keep-Out Layer:
  the board outline again, w0.254

## Other copper
Top Layer:
  pour cut-out: 54.879,16.198 55.346,16.2 55.346,17.954 55.26,18.04 55.26,18.477 55.214,18.753 54.899,18.753 54.861,18.082 54.82,18.04 54.82,16.198
  pour cut-out: 49.599,36.717 50.351,36.717 50.305,36.671 50.305,33.493 50.317,33.493 50.531,33.279 50.021,32.769 50.021,32.745 49.336,33.429 49.404,33.497 49.712,33.497 49.712,36.483 49.607,36.588
  pour cut-out: 51.014,25.62 51.563,25.62 51.563,27.892 51.417,28.038 51.084,28.038 51.019,27.974 51.019,27.455
  pour cut-out: 47.833,10.196 47.993,10.196 48.077,10.289 48.077,10.916 47.854,11.139 47.684,11.018 47.407,11.049 47.042,11.068 46.928,11.049 47.238,10.739 47.286,10.691 47.537,10.485
  pour cut-out: 50.027,9.77 50.66,9.77 50.66,10.777 50.807,11.023 50.211,11.654 50.099,11.654 50.301,11.529 50.409,11.344 50.409,11.039 50.338,10.902 50.285,10.82 50.245,10.757 50.195,10.269 50.121,10.195 50.121,9.864
  pour cut-out: 45.593,19.991 45.635,19.949 46.888,19.949 47.144,20.205 47.043,20.306 45.624,20.306 45.577,20.259
  pour cut-out: 48.342,14.362 48.427,14.362 48.717,14.072 48.953,14.072 48.953,14.107 49.141,14.295 49.105,14.33 49.105,16.226 48.989,16.342 48.989,18.525 48.658,18.525 48.454,18.525 48.483,16.972
  pour cut-out: 44.566,16.203 45.359,16.203 45.362,16.206 45.168,16.4 45.168,18.389 45.098,18.459 45.098,18.886 45.435,19.223 45.742,19.223 45.742,19.527 45.69,19.579 44.052,19.579 44.052,19.173 44.096,19.129 44.118,19.15 44.492,19.15 44.767,18.875 44.767,18.275 44.677,18.185 44.677,17.992
  pour cut-out: 45.992,16.198 46.437,16.198 46.378,16.257 46.378,18.256 46.623,18.5 46.601,18.522 46.601,19.505 46.497,19.609 45.868,19.609 45.698,19.44 45.709,19.429 45.709,19.142 45.716,19.142 46.024,18.834 46.01,18.821 46.01,18.489 45.865,18.343 45.941,18.267 45.941,18.143
  pour cut-out: 89.499,32.952 89.896,32.952 89.896,32.189 89.759,32.052 89.561,32.052 89.561,32.608 89.533,32.636 89.542,32.644 89.542,32.86 89.406,32.86 89.401,32.865
  pour cut-out: 82.049,32.951 82.497,32.951 82.497,32.134 82.404,32.041 82.116,32.041 82.116,32.567 82.122,32.573 82.109,32.587 82.109,32.828 82.03,32.828 82.007,32.851
  pour cut-out: 74.672,31.697 75.181,31.697 75.182,31.698 75.096,31.784 75.096,32.537 75.041,32.593 74.961,32.513 74.746,32.513 74.746,31.906 74.648,31.808
  pour cut-out: 13.85,9.125 15.1,9.125 15.1,9.375 12.686,11.789 12.623,11.789 12.452,11.618 12.702,11.369 12.702,10.693 12.544,10.535 12.544,10.316
  pour cut-out: 10.178,10.224 11.768,8.634 13.224,8.634 13.311,8.721 11.911,10.121 11.911,10.363 11.808,10.363 11.329,10.841 10.894,10.406 10.229,10.406 10.202,10.379
Bottom Layer:
  pour cut-out: 68.924,16.448 70.087,16.62 70.087,16.93 69.902,17.154 69.575,16.827 69.208,16.827
  pour cut-out: 37.302,7.239 37.46,7.239 37.554,7.332 37.584,7.302 39.126,7.302 39.126,7.379 38.342,8.163 38.129,8.163 37.946,7.98 37.643,7.98 37.528,8.095 37.494,8.061 37.243,8.061
  pour cut-out: 54.718,17.75 55.425,17.75 55.425,17.875 55.25,18.05 55.25,18.55 54.991,18.55 54.91,18.47 54.91,18.095 54.688,17.873 54.647,17.873
  pour cut-out: 37.275,8.975 37.25,9 37.25,11.775 36.575,12.45 36.575,12.9 38.3,12.9 38.25,12.85 38.25,12.5 38.15,12.4 38.15,12.151 37.598,11.599 37.598,8.964 37.595,8.961
  pour cut-out: 38.682,20.318 38.682,20.302 39.062,19.921 39.074,19.933 42.141,19.933 42.55,20.342 42.406,20.487 40.654,20.487 40.453,20.286 40.081,20.286 39.828,20.539 38.665,20.539

## Silkscreen, mask and mechanical layers (free items; w line width, h text height)
Top Overlay:
  lines w0.1: 5.873,42.673 19,42.673 19,48.027 5.873,48.027 5.873,42.673
  text "Anton - 2021 / Project Buran v1.1" at 70,43.025 h1.52
  text "1:VCC / 2,4:SWDIO:SWCLK / 3,5:GND / 10:/RESET" at 6.1,42.8 h1.8
Bottom Overlay:
  drawing of 16 lines, arcs and shapes, not listed
  text "much hodl" at 77.573,45.027 h0.76
  text "such chip" at 75.673,41.081 h0.76
  text "very electric" at 75.273,36.881 h0.76
  text "wow" at 74.973,33.327 h0.76

## Text inside footprints (layer, text, board x,y; h text height)
P1: Top Overlay "2" at 4.95,40.655 h1.02; Top Overlay "1" at 5.25,37.955 h1.02; Top Overlay "9" at 19.4,37.7 h1.02; Top Overlay "10" at 19.4,41.3 h1.02